# Altium PCB EnvUnitPCB.PcbDoc (part 4 of 4)
Units mm, origin at the board's own origin, x right, y up, seen from the top; angles counter-clockwise.
Board outline 110.5 x 67 mm, 4 copper layers (TOP, GND, VCC, BOT), stack 1.586 mm thick; 184 components, 135 nets, 655 pads, 1338 vias.
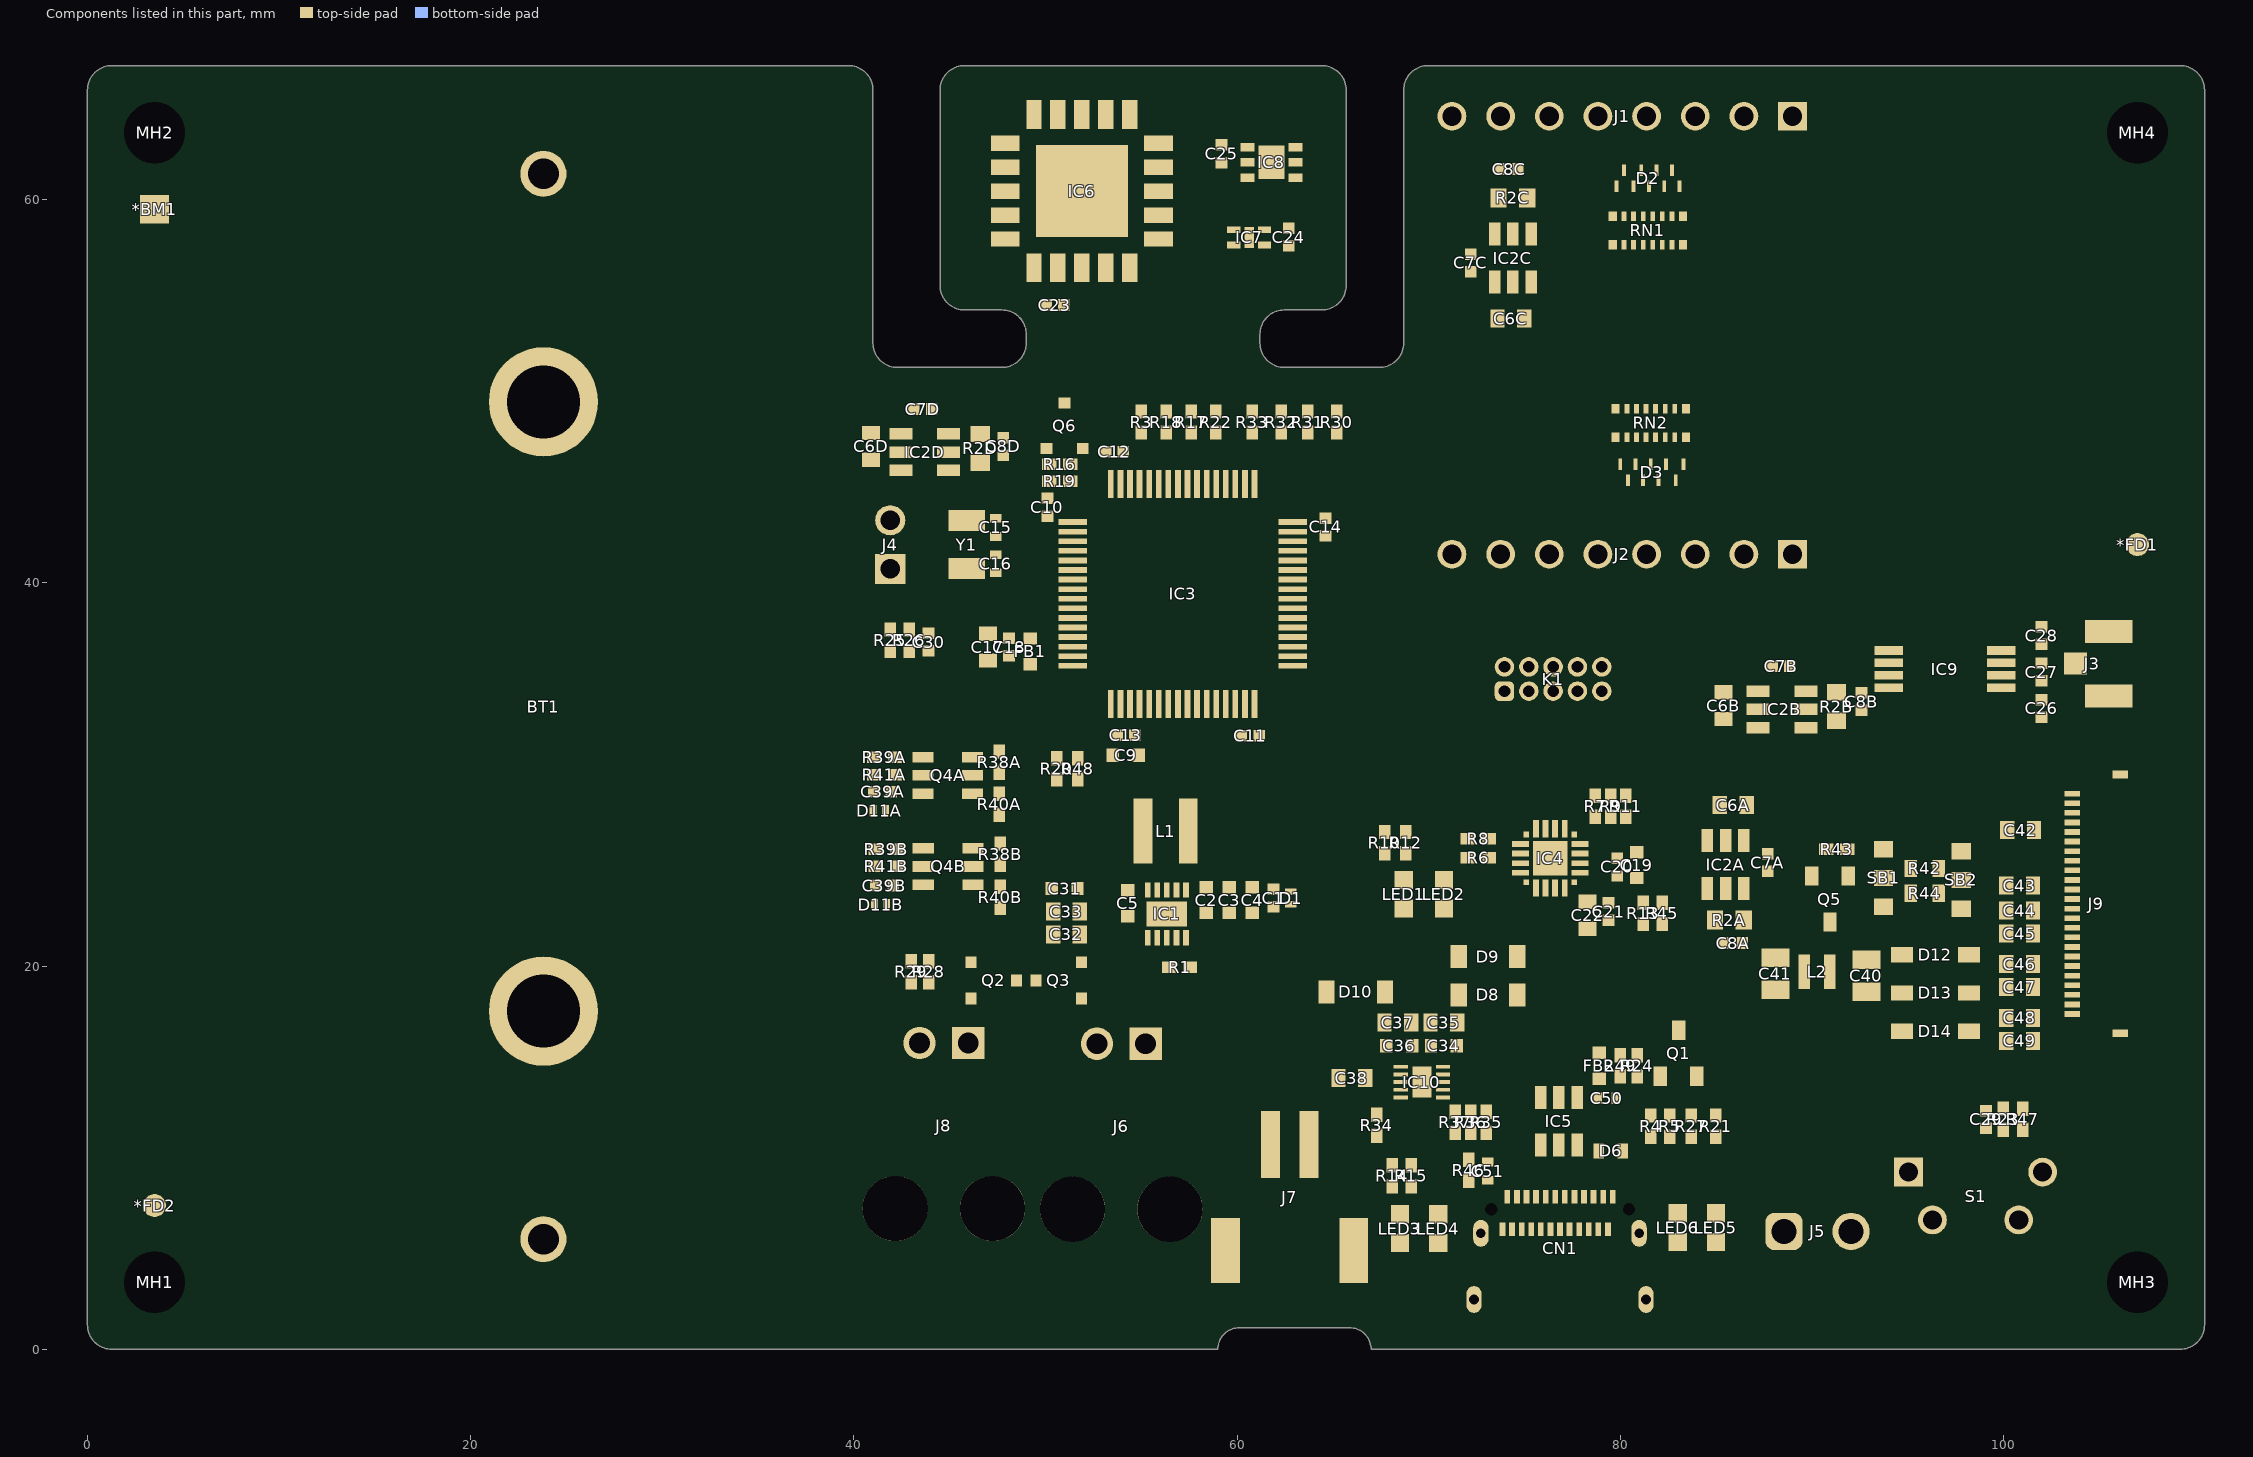
[diagram p6: the components of this part, seen from the top]

## Other copper
TOP:
  pour cut-out: 3.503,6.276 cw(c3.503,7.497) 2.283,7.497 cw(c3.503,7.497) 3.503,8.718 cw(c3.503,7.497) 4.724,7.497 cw(c3.503,7.497)
  region net GND: 55.193,23.368 63.107,23.368 63.275,23.2 63.275,21.9 63.1,21.725 57.775,21.725 57.425,22.075 55.075,22.075 54.575,21.575 53.05,21.575 53.05,21.6 52.875,21.775 52.875,22.957 53.068,23.15 54.975,23.15
  region net NetQ2_3: 48.063,18.9 48.138,18.825 49.863,18.825 49.938,18.9 49.938,19.575 49.863,19.65 48.138,19.65 48.063,19.575
  region net VBAT_SO: 45.2,15 45.1,15.1 45.1,18.5 45.3,18.7 46.7,18.7 46.9,18.5 46.9,15.1 46.8,15
  pour cut-out: 44.125,44.8 48.95,44.8 48.95,43.2 49.875,43.2 50.25,42.825 52.3,42.8 52.3,42.3 52.3,41.925 52.3,41.625 52.075,41.4 50.7,41.4 50.25,40.95 50.25,40.425 49.275,40.425 49.275,39.5 49.025,39.25 44.125,39.25
  pour cut-out: 90.7,38.9 90.7,67 110.5,67 110.5,38.9
  region net 3V3_SENS: 45.65,47.425 45.85,47.225 47.05,47.225 48.825,47.225 49,47.4 49,48 48.8,48.2 44.425,48.2 44.25,48.025 44.25,47.525 44.35,47.425
  region net 3V3: 43.05,47.325 41.45,47.325 41.15,47.025 39.55,47.025 39.35,47.225 39.35,48.025 39.55,48.225 42.95,48.225 43.09,48.085 43.09,47.365
  region net VDC: 70.45,15 70.375,14.925 70.375,14.65 71.3,14.65 72.125,15.475 72.125,21.075 72,21.2 71.2,21.2 71.1,21.1 71.1,15.5 70.6,15
  pour cut-out: 42.27,50.259 42.27,67.009 67.43,67.009 67.43,50.259
  region net GND: 56.191,29.2 56.485,29.2 56.485,23.2 56.191,23.2
  region net GND: 68.75,18.65 68.6,18.5 68.6,15.45 68.8,15.25 69,15.25 69.15,15.1 69.15,12.55 69.3,12.4 70,12.4 70.15,12.55 70.15,15.1 70.3,15.25 70.5,15.25 70.7,15.45 70.7,18.5 70.55,18.65
  region net 3V3: 86.1,26 86.1,27.6 85.8,27.9 85.8,29.5 86,29.7 86.8,29.7 87,29.5 87,26.1 86.86,25.96 86.14,25.96
  region net 3V3_EINK: 86.65,19.75 86,20.4 86,24.7 86.85,24.7 86.85,21.28 87.18,20.95 89.9,20.95 90.1,20.75 90.1,18.75 89.964,18.614 89.436,18.614 89.3,18.75 89.3,19.65 89.2,19.75
  region net NetC40_1: 91.77,21 91.55,21.22 91.55,22.9 91.45,23 90.55,23 90.35,22.8 90.35,18.7 90.45,18.6 91.45,18.6 91.55,18.7 91.55,19.55 91.8,19.8 95.25,19.8 95.35,19.9 95.35,20.9 95.25,21
  region net 3V3_RF: 73.1,57.575 73.1,63.5 72.8,63.8 72.8,64.875 73.15,65.225 74.25,65.225 74.7,64.775 74.7,63.9 74.141,63.341 74.141,59.316 73.751,58.926 73.751,57.575
  region net 3V3: 73.8,56.3 73.8,54.7 74.1,54.4 74.1,52.652 73.945,52.497 73.045,52.497 72.9,52.642 72.9,56.2 73.04,56.34 73.76,56.34
  pour cut-out: 90.7,38.9 90.7,67 110.5,67 110.5,38.9
  region net VIN: 65.2,18.13 65.12,18.05 53.35,18.05 51.312,20.087 51.312,24.262 51.5,24.45 55.41,24.45 55.486,24.374 55.486,23.639 55.421,23.575 55.037,23.575 54.813,23.35 52.85,23.35 52.5,23 52.5,20.5 53.75,19.25 65.11,19.25 65.2,19.16
  region net NetIC1_7: 56.987,24.47 57.467,24.95 57.7,24.95 58.05,25.3 58.05,28.725 58,28.775 56.885,28.775 56.882,28.779 56.717,28.614 56.717,25.188 56.825,25.08 56.825,24.65 56.692,24.517 56.692,23.622 56.742,23.572 56.953,23.572 56.987,23.606
  region net NetIC1_9: 55.692,24.461 54.904,25.25 54.6,25.25 54.475,25.375 54.475,28.725 54.6,28.85 55.8,28.85 55.983,28.667 55.983,25.133 55.9,25.05 55.9,24.55 55.983,24.467 55.983,23.633 55.922,23.572 55.732,23.572 55.692,23.612
  region net 3V3: 63.225,23.65 63.5,23.375 63.5,22.903 63.753,22.65 65.249,22.65 65.5,22.901 65.5,24.25 65.275,24.475 57.293,24.475 57.192,24.374 57.192,23.606 57.224,23.575 57.825,23.575 57.9,23.65
  region net 3V3: 87.8,33.95 86.2,33.95 85.9,33.65 84.3,33.65 84.1,33.85 84.1,34.65 84.3,34.85 87.7,34.85 87.84,34.71 87.84,33.99
  region net 3V3_NFC: 90.5,34.05 90.7,33.85 91.9,33.85 94.6,33.85 94.747,33.997 94.747,34.603 94.6,34.75 89.2,34.75 89.1,34.65 89.1,34.15 89.2,34.05
  pour cut-out: 2.75,13.729 4.45,13.729 4.45,9.9 2.75,9.9
  region net +5V: 82.079,25.021 82.2,24.9 82.2,24.25 82.1,24.15 78.8,24.15 78.221,24.729 77.466,24.729 77.466,25.021
  region net VBAT_LI: 54.05,15.05 54.35,14.75 56.396,14.75 57.305,15.875 64.975,15.875 66.325,14.525 66.325,13.675 67.175,13.675 67.75,14.25 68.9,14.25 68.919,14.269 68.919,14.448 67.802,14.448 66.375,15.875 65.3,16.95 54.348,16.95 54.048,16.65 54.048,15.877 54.05,15.875
  region net VCCD: 68.15,20.35 68.4,20.1 68.4,15.275 68.675,15 68.875,15 68.926,14.949 68.926,14.731 68.846,14.65 67.9,14.65 66.8,15.75 66.8,20.1 67.053,20.35
  region net P3V3: 77.4,24.522 77.4,23.25 77.662,22.988 80.488,22.988 80.6,23.1 80.6,23.8 80.45,23.95 78.6,23.95 78.028,24.522
  region net VBAT_SO_IN: 25.2,4.5 25,4.3 22.6,4.3 22.4,4.5 22.4,9 30.4,17 44.4,17 44.6,16.8 44.6,15.1 44.4,14.9 31.619,14.9 25.2,8.481
  region net VBAT_LI_IN: 53.4,16.95 53.7,16.65 53.7,13 54.05,12.65 62.15,12.65 62.4,12.4 62.4,9.05 62.2,8.85 61.3,8.85 61.1,9.05 61.1,11.1 60.85,11.35 52.8,11.35 51.7,12.45 51.7,16.65 52,16.95
  text "1" at 4.024,10.325 h0.8 r90
GND:
  pour cut-out: 49.275,39.5 49.025,39.25 44.125,39.25 44.125,44.8 44.342,44.8 44.322,39.45 48.925,39.45 49.075,39.6 49.075,40.625 50.05,40.625 50.05,41.05 50.6,41.6 51.975,41.6 52.4,42.025 52.4,42.625 50.125,42.625 49.75,43 48.75,43 48.75,44.6 44.342,44.6 44.342,44.8 48.95,44.8 48.95,43.2 49.875,43.2 50.25,42.825 52.225,42.825 53.729,44.329 54.052,44.329 54.255,44.125 54.255,43.88 52.6,42.225 52.6,41.925 52.075,41.4 50.7,41.4 50.25,40.95 50.25,40.425 49.275,40.425
  pour cut-out: 42.27,50.25 42.27,67 67.43,67 67.43,50.25
  pour cut-out: 90.7,38.9 90.7,67 110.5,67 110.5,38.9
  pour cut-out: 2.75,13.729 4.45,13.729 4.45,9.9 2.75,9.9
  text "2" at 4.024,10.975 h0.8 r90
VCC:
  pour cut-out: 90.7,38.9 90.7,67 110.5,67 110.5,38.9
  pour cut-out: 42.27,50.25 42.27,67 67.43,67 67.43,50.25
  text "3" at 4.024,12.475 h0.8 r90
BOT:
  pour cut-out: 44.125,44.8 48.95,44.8 48.95,43.2 49.875,43.2 50.25,42.825 52.3,42.8 52.3,42.3 52.3,41.925 52.3,41.625 52.075,41.4 50.7,41.4 50.25,40.95 50.25,40.425 49.275,40.425 49.275,39.5 49.025,39.25 44.125,39.25
  pour cut-out: 42.27,50.25 42.27,67 67.43,67 67.43,50.25
  pour cut-out: 90.7,38.9 90.7,67 110.5,67 110.5,38.9
  pour cut-out: 2.75,13.729 4.45,13.729 4.45,9.9 2.75,9.9
  pour cut-out: 2.75,13.729 4.45,13.729 4.45,9.9 2.75,9.9
  text "4" at 4.024,13.325 h0.8 r90

## Silkscreen, mask and mechanical layers (free items; w line width, h text height)
Top Overlay:
  drawing of 6 lines, arcs and shapes, not listed
  text "-" at 23.1,63.4 h2
  text "LocuSense" at 94.05,51.65 h1.52
  text "Rev .Revision" at 101,49.7 h1
  text "RST" at 40.2,40.9 h0.76 r90
  text "JCOMM" at 69.497,38.715 h1.8
  text "JNFC" at 108.785,33.2 h1.8 r90
  text "JSWD" at 69.749,31.115 h1.8
  text "TX" at 69.1,20.5 h0.76 r90
  text "RX" at 70.7,20.5 h0.76 r90
  text "JDISP" at 108.285,15.964 h1.8 r90
  text "5-18 VDC" at 87.6,12.9 h0.76
  text "+" at 87.9,10.667 h2
  text "-" at 91,10.6 h2
  text "JBAT" at 60.627,2.315 h1.8
  text "+" at 23.3,1.567 h2
  text "JP_LISOCL2" at 40.514,1.308 h1.8
  text "JP_LI" at 51.876,1.308 h1.8
  text "JSOLAR_IN" at 86.41,1.308 h1.8
  text "SW_USER" at 95.154,1.308 h1.8
  text "STAT1" at 68.988,1.044 h1.5 r90
  text "STAT2" at 70.788,1.039 h1.5 r90
  text "VBUS" at 83.488,1.017 h1.5 r90
  text "STATE" at 85.388,1.035 h1.5 r90
Top Designator:
  text "Q2" at 46.65,18.85 h0.8
Outline:
  lines w0.1: 0,1.27 ccw(c1.27,1.27) 1.27,0 59,0 cw(c60.121,0) 60.121,1.121 65.879,1.121 cw(c65.879,0) 67,0 109.23,0 ccw(c109.23,1.27) 110.5,1.27 110.5,4.25 110.5,64.25 110.5,65.73 ccw(c109.23,65.73) 109.23,67 108,67 69.97,67 ccw(c69.97,65.73) 68.7,65.73 68.7,52.52 cw(c67.43,52.52) 67.43,51.25 62.47,51.25 cw(c62.47,52.52) 61.2,52.52 61.2,52.98 cw(c62.47,52.98) 62.47,54.25 64.43,54.25 ccw(c64.43,55.52) 65.7,55.52 65.7,65.73 ccw(c64.43,65.73) 64.43,67 45.77,67 ccw(c45.77,65.73) 44.5,65.73 44.5,55.52 ccw(c45.77,55.52) 45.77,54.25 47.73,54.25 cw(c47.73,52.98) 49,52.98 49,52.52 cw(c47.73,52.52) 47.73,51.25 42.27,51.25 cw(c42.27,52.52) 41,52.52 41,65.73 ccw(c39.73,65.73) 39.73,67 3.5,67 1.27,67 ccw(c1.27,65.73) 0,65.73 0,63.25 0,4.25 0,2.02 0,1.27

## Text inside footprints (layer, text, board x,y; h text height)
CN1: Mechanical 14 "B12" at 73.215,5.975 h0.75; Mechanical 14 "B1" at 79.135,6 h0.75; Mechanical 14 "A1" at 73.66,7.65 h0.75; Mechanical 14 "A12" at 79.085,7.625 h0.75; Mechanical 7 "PCB" at 68.41,-0.705 h1.2; Mechanical 7 "EDGE" at 82.985,-0.705 h1.2
K1: Top Overlay "1" at 70.81,33.15 h1; Mechanical 13 "1" at 72.36,33.842 h1.02